# Altium PCB DashDataDisplayPCB.PcbDoc (part 4 of 4)
Units mm, origin at the board's own origin, x right, y up, seen from the top; angles counter-clockwise.
Board outline 152.4 x 101.6 mm, 2 copper layers (Top Layer, Bottom Layer); 143 components, 97 nets, 509 pads, 233 vias.
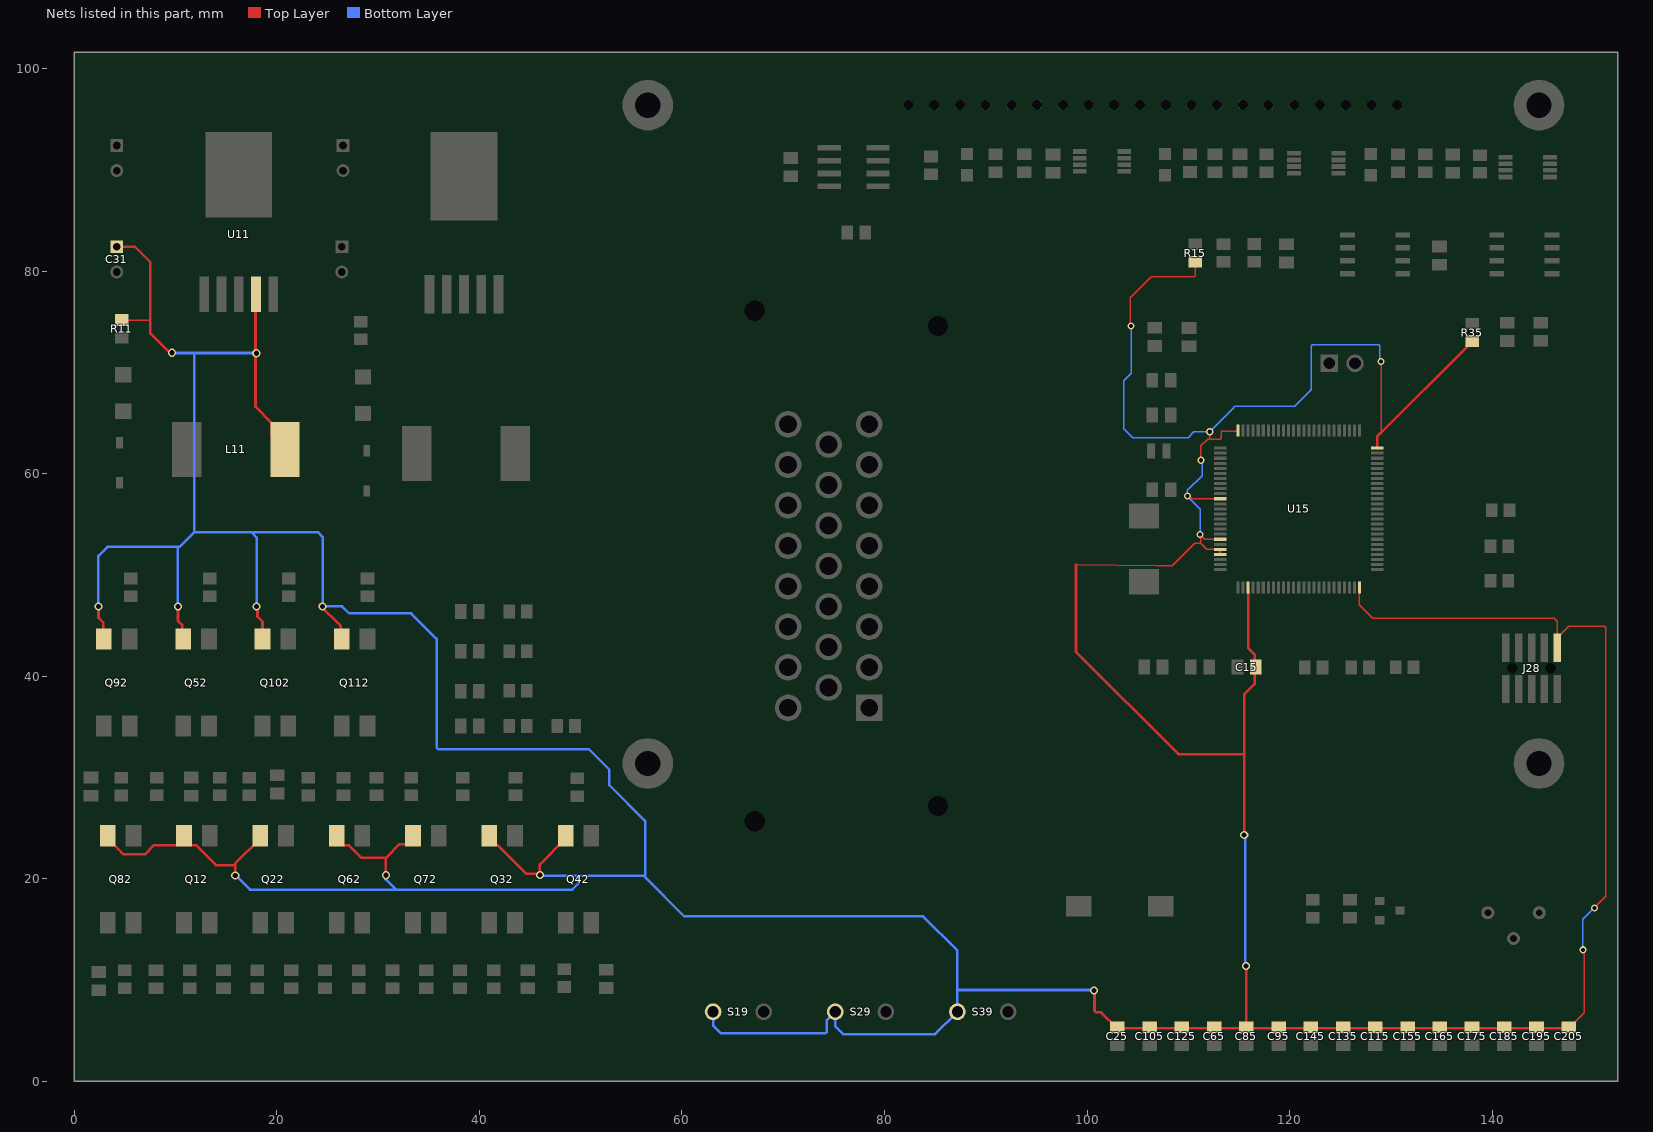
[diagram p3: the nets of this part, all layers, seen from the top]

## Via types
v1: diameter 0.8, hole 0.5, Top Layer to Bottom Layer, 177 vias
v2: diameter 0.7, hole 0.4, Top Layer to Bottom Layer, 55 vias
v3: diameter 1.27, hole 0.711, Top Layer to Bottom Layer, 1 vias

## Nets (pads, with @x,y where several pads share a name; then routed paths per layer and width w, separated by ;. In a path a pad name is that pad's centre, name@x,y a point inside that pad or via, vN(x,y) a via of type N, cw(c..) or ccw(c..) an arc to the next point about the centre after c; other vN are vias at no path point) (continued)
VCC: C15.2 C25.2 C31.1 C65.2 C85.2 C95.2 C105.2 C115.2 C125.2 C135.2 C145.2 C155.2 C165.2 C175.2 C185.2 C195.2 C205.2 J28.1 L11.2 Q12.4 Q22.4 Q32.4 Q42.4 Q52.4 Q62.4 Q72.4 Q82.4 Q92.4 Q102.4 Q112.4 R11.2 R15.2 R35.2 S19.2 S29.2 S39.2 U11.4 U15.11 U15.19 U15.21 U15.22 U15.28 U15.50 U15.75 U15.100 | length 660.3
  Top Layer w0.127: R11.2@4.67,75.16 7.48,75.16 7.51,75.13 ; 98.91,51 99.089,51 106.842,50.89 108.412,50.89 110.639,53.117 111.233,53.117 111.24,53.11 ; v2(104.36,74.56) 104.29,74.63 104.29,77.38 106.34,79.43 110.6,79.43 110.674,79.504 R15.2@110.674,80.902 ; v2(109.912,57.768) 110.067,57.768 110.321,57.515 U15.11@113.154,57.515 ; v2(111.16,53.97) v2@111.24,53.89 ; v2(111.25,61.32) 111.25,62.73 111.93,63.41 112.13,63.41 ; v2(112.12,64.13) 112.13,64.12 112.13,63.41 ; U15.21@113.154,52.515 111.835,52.515 111.24,53.11 ; U15.19@113.154,53.515 111.615,53.515 v2@111.24,53.89 ; U15.100@114.904,64.265 114.839,64.2 113.324,64.2 113.25,64.126 113.25,63.484 113.176,63.41 112.13,63.41 ; U15.28@115.904,48.765 U15.28@115.988,48.849 ; U15.50@126.904,48.765 126.904,47.036 128.23,45.71 146.15,45.71 146.431,45.429 J28.1@146.431,43.827 ; 128.983,63.987 129.03,64.034 v2(129.03,71.08) ; J28.1@146.431,43.79 J28.1@146.431,43.827 ; C205.2@147.574,5.245 147.624,5.245 148.21,5.831 148.21,5.881 149.1,6.771 149.1,12.84 v2(148.96,12.98) ; v2(150.09,17.12) 151.23,18.26 151.23,44.78 151.07,44.94 147.581,44.94 146.775,44.134 146.738,44.134 J28.1@146.431,43.827 ; 111.24,53.11 v2@111.24,53.89
  Top Layer w0.254: v1(2.39,46.89) 2.39,45.77 2.86,45.3 2.86,43.731 Q92.4@2.921,43.67 ; Q82.4@3.302,24.239 3.302,23.964 4.29,22.976 4.29,22.96 4.84,22.41 6.98,22.41 7.886,23.316 10.189,23.316 Q12.4@10.837,23.964 ; C31.1@4.191,82.398 5.982,82.398 7.51,80.87 7.51,75.13 7.51,73.83 v1@9.54,71.8 ; v1(10.24,46.89) 10.24,45.46 10.64,45.06 10.64,43.783 Q52.4@10.753,43.67 ; Q12.4@10.837,24.239 Q12.4@10.837,23.964 ; v1(15.89,20.33) 15.89,21.34 ; U11.4@17.932,77.724 17.89,77.682 17.89,66.61 19.487,65.013 19.487,63.703 L11.2@20.81,62.38 20.81,62.313 L11.2@22.133,60.99 ; v1@18.01,47.02 18.093,46.937 18.093,45.877 18.584,45.386 Q102.4@18.584,43.67 ; Q22.4@18.373,24.239 18.373,23.964 15.89,21.481 15.89,21.34 ; v1@24.224,47.046 26.318,44.952 26.318,43.768 Q112.4@26.416,43.67 ; Q62.4@25.908,24.239 25.908,23.964 26.556,23.316 27.084,23.316 28.34,22.06 30.77,22.06 ; v1(30.77,20.34) 30.77,22.06 ; Q72.4@33.443,24.239 33.443,24.058 32.795,23.41 32.12,23.41 30.77,22.06 ; Q32.4@40.979,24.239 40.979,23.964 41.627,23.316 41.784,23.316 44.6,20.5 45.84,20.5 v1(45.97,20.37) ; v1@45.97,20.58 45.97,21.42 48.514,23.964 Q42.4@48.514,24.239 ; 98.91,51 98.91,42.4 109.02,32.29 115.52,32.29 ; v1(100.7,8.97) 100.74,8.93 100.74,6.949 100.889,6.8 101.392,6.8 102.947,5.245 C85.2@115.733,5.245 ; U15.22@113.154,52.015 U15.21@113.154,52.515 ; v1(115.52,24.33) 115.52,32.29 ; v1@115.733,11.157 C85.2@115.733,5.245 ; U15.28@115.904,48.765 115.9,48.761 115.9,42.78 116.553,42.127 116.553,39.203 115.52,38.17 115.52,32.29 ; U15.75@128.654,62.515 128.654,63.658 128.983,63.987 ; 129.03,64.034 137.501,72.505 137.501,72.605 137.949,73.053 R35.2@138.049,73.053 ; C205.2@147.574,5.245 141.206,5.245 C85.2@115.733,5.245 ; Q12.4@10.837,23.964 11.485,23.316 12.013,23.316 13.989,21.34 15.89,21.34
  Bottom Layer w0.127: v2(104.36,74.56) 104.36,69.9 103.63,69.17 103.63,64.43 104.5,63.56 109.98,63.56 110.55,64.13 v2(112.12,64.13) 114.5,66.51 114.5,66.586 114.574,66.66 120.52,66.66 122.14,68.28 122.14,72.59 122.26,72.71 128.81,72.71 128.9,72.62 128.9,70.74 128.91,70.73 ; v2(111.16,53.97) 111.18,53.99 111.18,56.501 v2(109.912,57.768) 109.912,58.362 111.36,59.81 v2@111.36,61.29 ; v2(148.96,12.98) 148.96,15.99 149.98,17.01 v2@149.98,17.21
  Bottom Layer w0.254: v1(2.39,46.89) 2.37,46.91 2.37,51.88 3.26,52.77 10.22,52.77 ; v1(9.63,71.93) 9.655,71.905 11.85,71.905 ; v1@10.22,46.66 10.22,52.77 ; v1@15.915,20.355 17.35,18.92 31.77,18.92 ; v1(17.97,71.88) 17.945,71.905 11.85,71.905 ; v1@18.01,47.02 18.01,53.68 17.48,54.21 ; v1@30.72,19.97 31.77,18.92 ; v1@45.97,20.29 45.99,20.27 49.75,20.27 ; S19.2@63.072,6.858 63.072,5.498 63.85,4.72 74.171,4.72 74.32,4.869 74.32,6.041 S29.2@75.12,6.841 ; S29.2@75.137,6.858 S29.2@75.12,6.841 ; v1(100.7,8.97) 100.66,9.01 87.202,9.01 ; v1(115.52,24.33) 115.615,24.235 115.615,11.485 v1(115.71,11.39) ; 10.22,52.77 10.41,52.77 11.85,54.21 ; 11.85,54.21 17.48,54.21 ; 11.85,54.21 11.85,71.905 ; 17.48,54.21 24.07,54.21 24.53,53.75 24.53,46.91 v1(24.51,46.89) 26.45,46.89 27.15,46.19 33.26,46.19 35.78,43.67 35.78,32.929 35.929,32.78 50.81,32.78 52.824,30.766 52.824,29.246 56.36,25.71 56.36,20.15 ; 31.77,18.92 49.17,18.92 49.75,19.5 49.75,20.27 ; 49.75,20.27 56.24,20.27 56.36,20.15 ; 56.36,20.15 60.23,16.28 83.81,16.28 87.202,12.888 87.202,9.01 ; S29.2@75.12,6.841 75.12,5.44 75.91,4.65 84.994,4.65 S39.2@87.202,6.858 87.202,9.01
  other v1: 18.01,46.89
pads on no net: J18.MH1 J18.MH2 J18.MH3 J18.MH4 J28.6 J28.7 J28.8 J28.9 J28.11 J28.12 LCD14.7 LCD14.8 LCD14.9 LCD14.10 LCD14.11 LCD14.12 LCD14.13 LCD14.14 LCD14.16 LCD14.17 LCD14.18 LCD14.21 LCD14.22 LCD14.23 LCD14.24 U11.6 U13.5 U15.1 U15.2 U15.3 U15.4 U15.5 U15.6 U15.7 U15.34 U15.35 U15.36 U15.37 U15.38 U15.39 U15.40 U15.44 U15.45 U15.46 U15.47 U15.48 U15.55 U15.56 U15.57 U15.58 U15.59 U15.60 U15.61 U15.62 U15.64 U15.65 U15.66 U15.67 U15.68 U15.69 U15.70 U15.71 U15.77 U15.80 U15.81 U15.82 U15.83 U15.84 U15.85 U15.86 U15.87 U15.88 U15.89 U15.90 U15.91 U15.92 U15.93 U15.97 U15.98 U17.8 U21.6 U26.5 U27.8

## Keep-outs
Keep-Out Layer:
  the board outline again, w0.254

## Dimensions
0,0 to 60.183,20.473 on Mechanical 15
152.4,101.6 to 60.183,81.273 on Mechanical 15
92.283,20.473 to 152.4,0 on Mechanical 15
0,0 to 60.183,20.473 on Mechanical 15

## Text inside footprints (layer, text, board x,y; h text height)
U11: Top Overlay "*" at 11.024,77.089 h1.27; Mechanical 13 "*" at 12.509,80.975 h1.27
U13: Top Overlay "*" at 74.06,93.09 h1.27; Mechanical 13 "*" at 75.07,91.367 h1.27
U16: Top Overlay "*" at 101.76,92.76 h1.27; Mechanical 13 "*" at 99.81,92.72 h1.27
U17: Top Overlay "*" at 128.32,85.07 h1.27; Mechanical 13 "*" at 126.524,82.806 h1.27
U21: Top Overlay "*" at 33.274,77.064 h1.27; Mechanical 13 "*" at 34.76,81.001 h1.27
U26: Top Overlay "*" at 122.75,92.86 h1.27; Mechanical 13 "*" at 120.01,92.95 h1.27
U27: Top Overlay "*" at 138.56,84.28 h1.27; Mechanical 13 "*" at 141.256,82.806 h1.27
U31: Top Overlay "*" at 3.72,64.74 h1.27 r270; Mechanical 13 "*" at 3.825,62.566 h1.27 r270
U36: Top Overlay "*" at 143.63,92.18 h1.27; Mechanical 13 "*" at 141.49,92.33 h1.27
U41: Top Overlay "*" at 28.26,63.98 h1.27 r270; Mechanical 13 "*" at 28.242,61.75 h1.27 r270